# Altium PCB DEP_REVC.PcbDoc
Units mm, origin at the board's own origin, x right, y up, seen from the top; angles counter-clockwise.
Board outline 95.88 x 101.32 mm, 4 copper layers (Top Layer, GND, GND (Plane2), Power), stack 1.586 mm thick; 15 components, 72 nets, 129 pads, 25 vias.
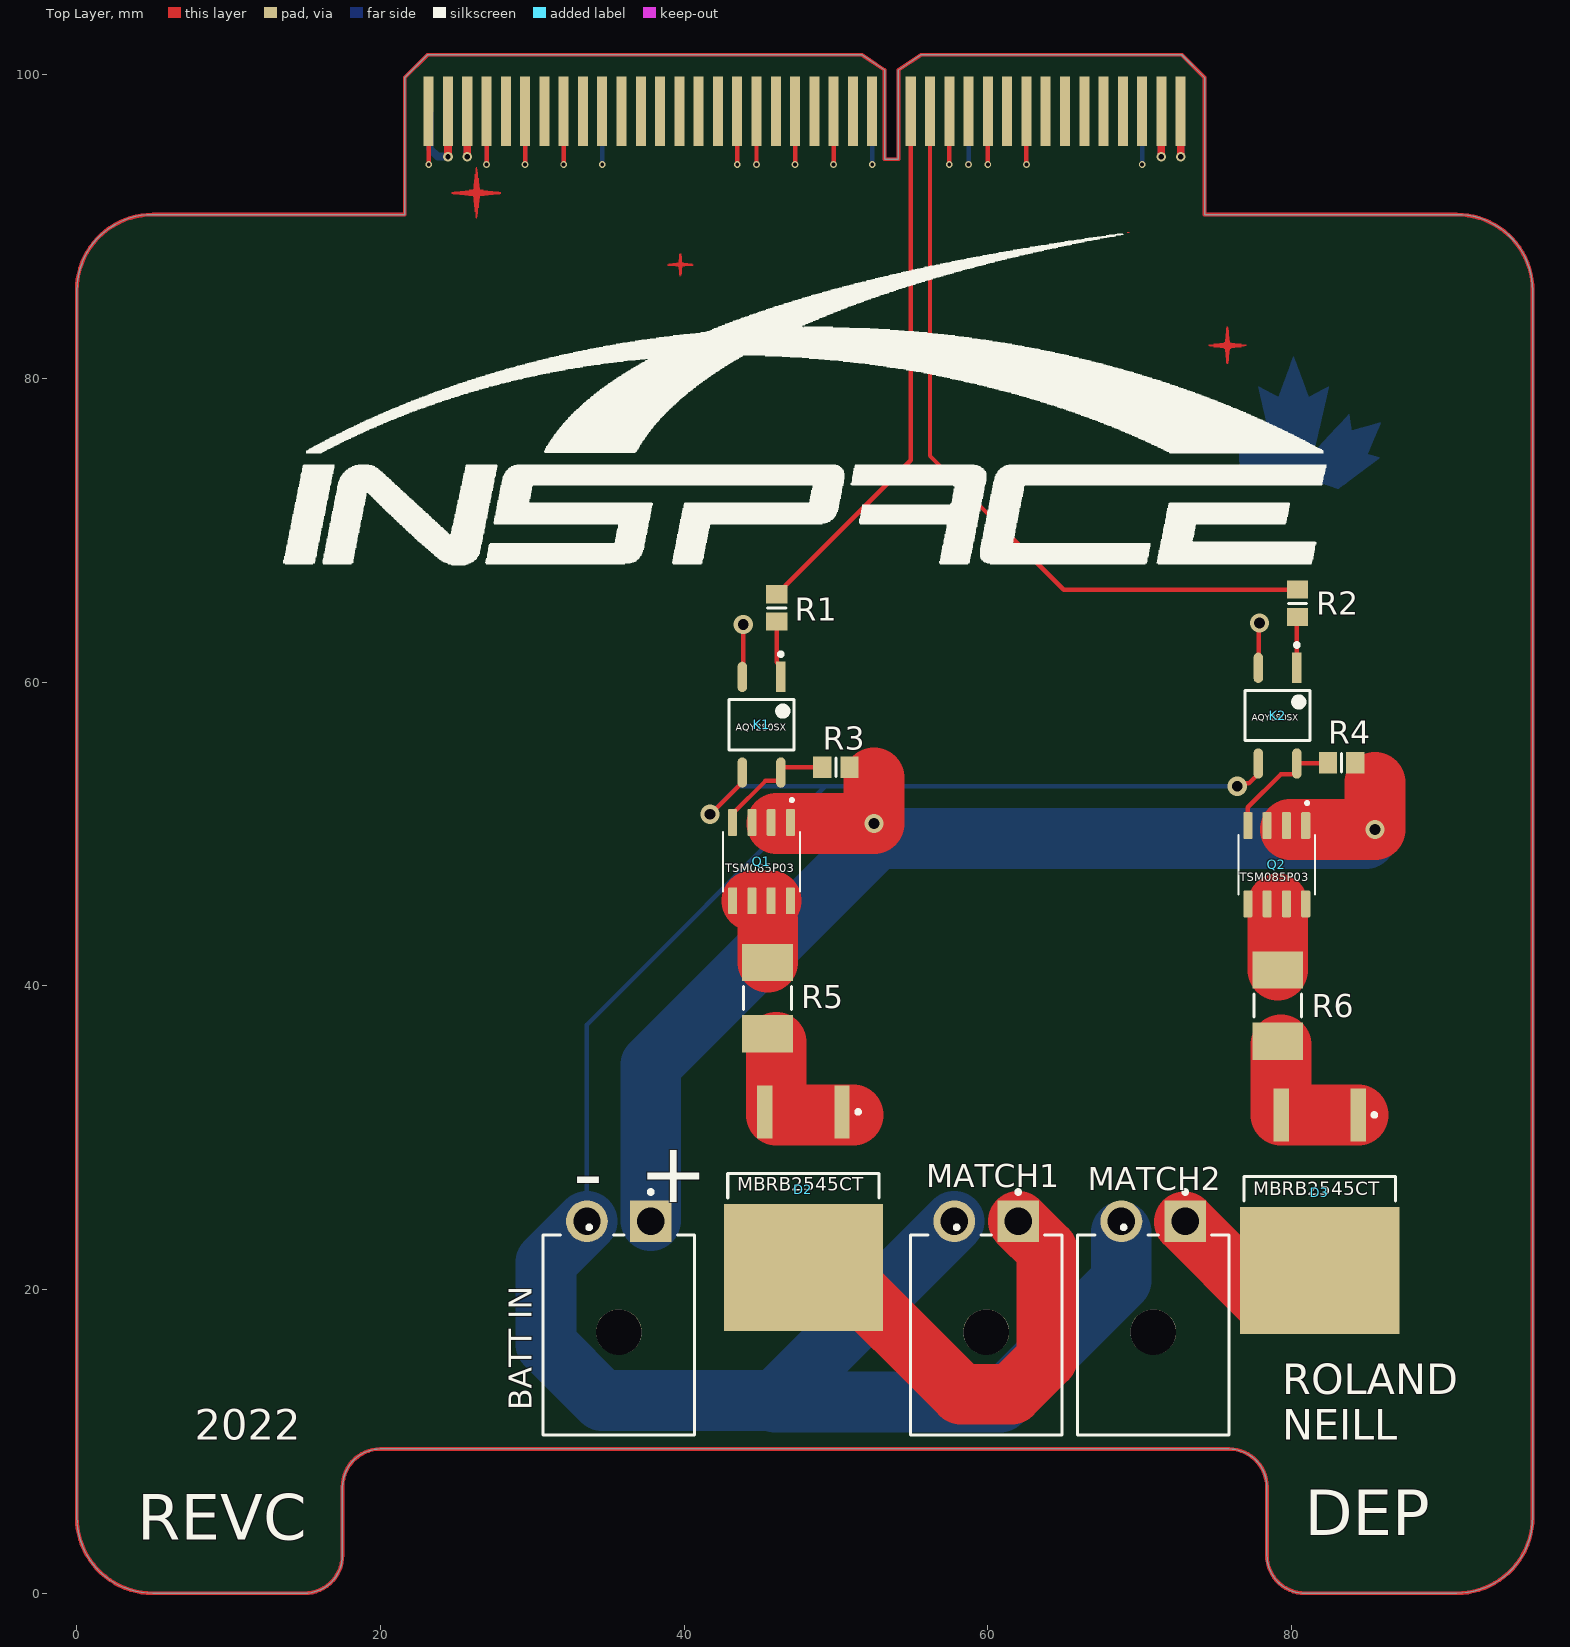
[diagram p0: Top Layer view]
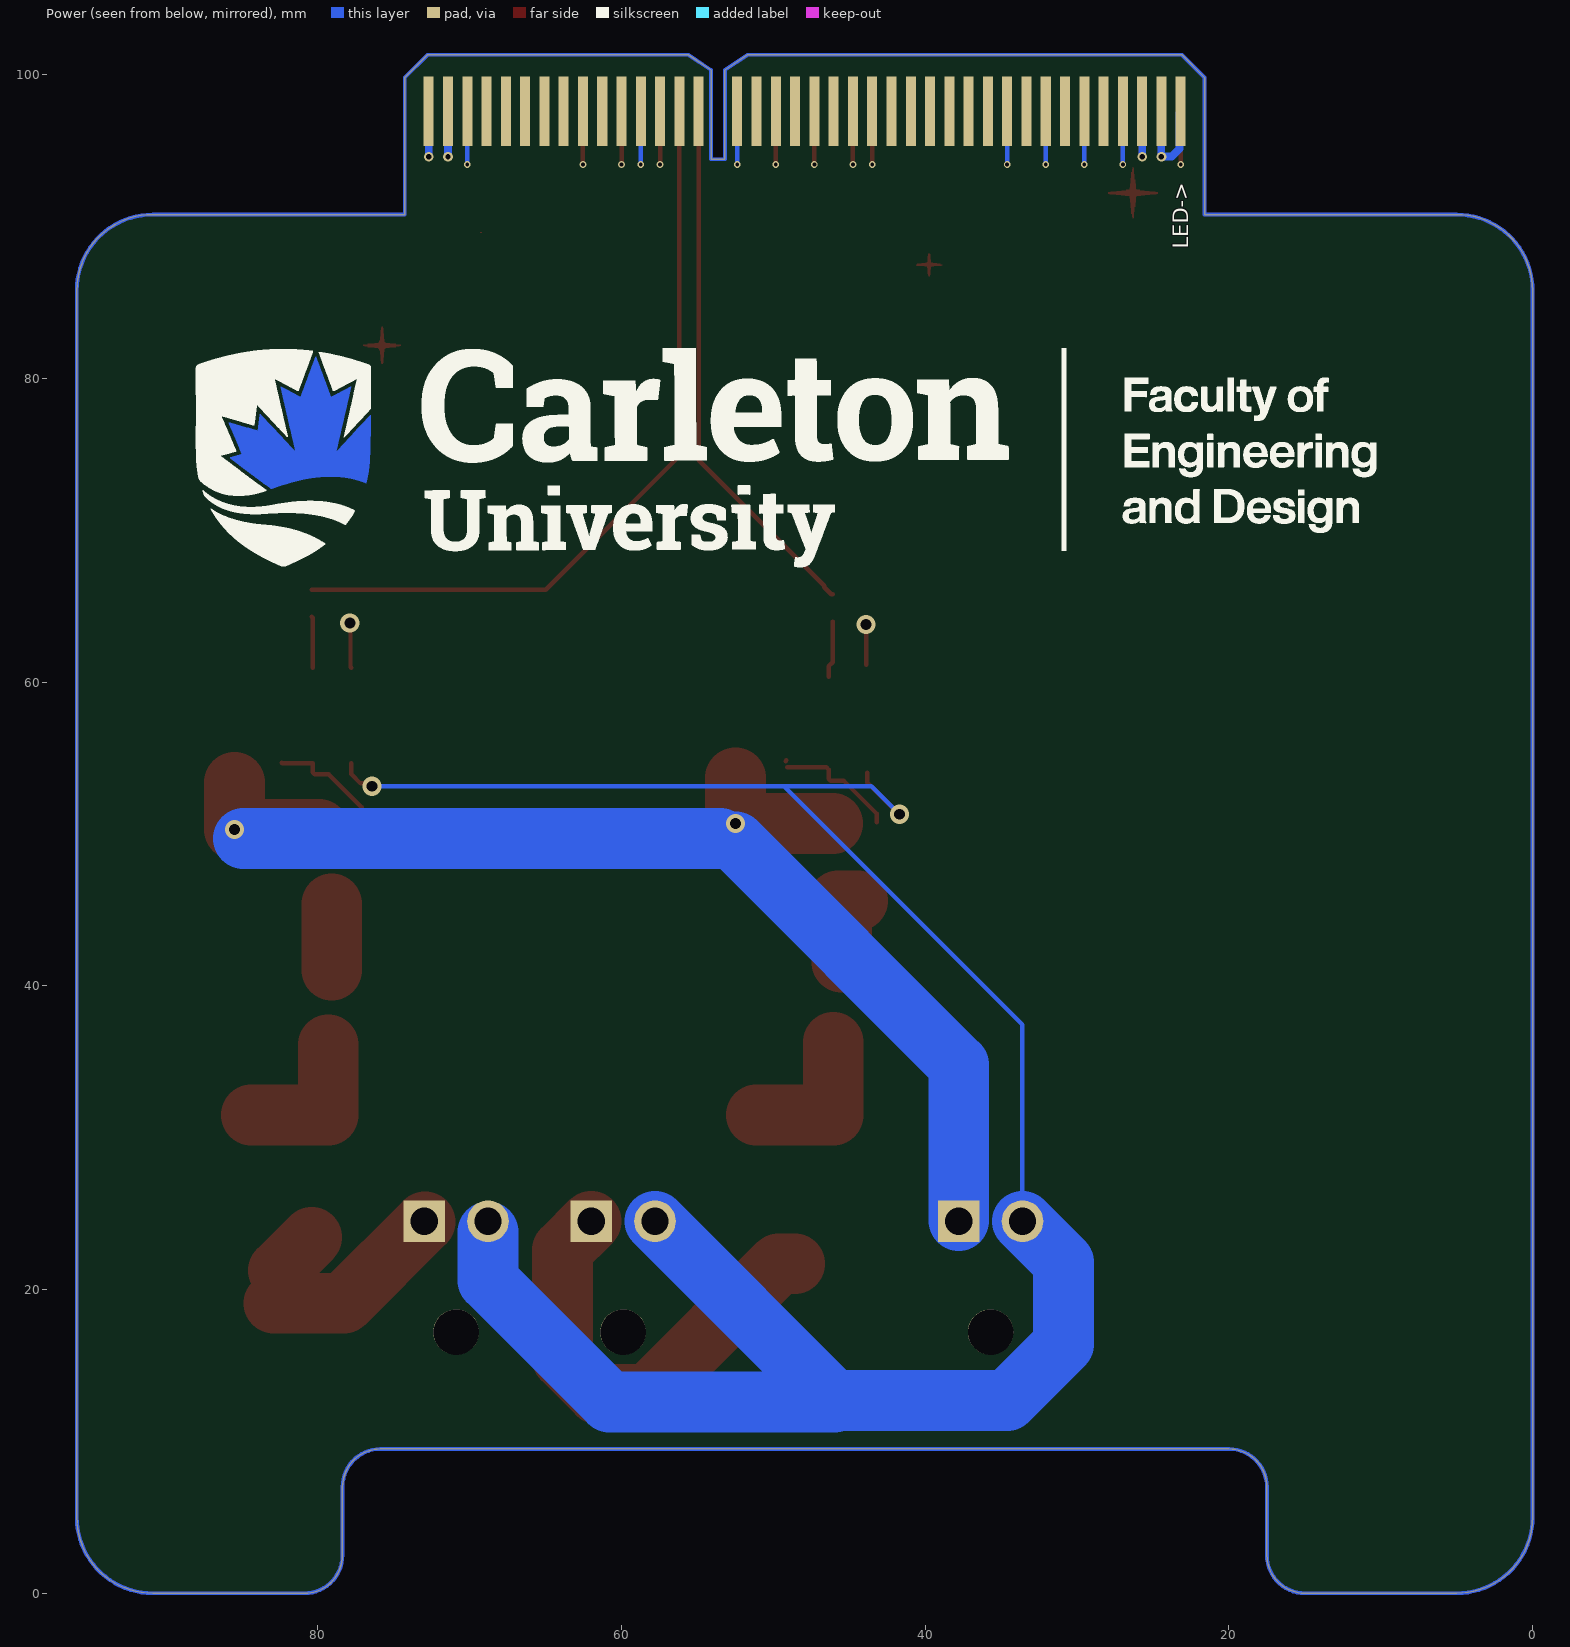
[diagram p1: Power view, seen from below]
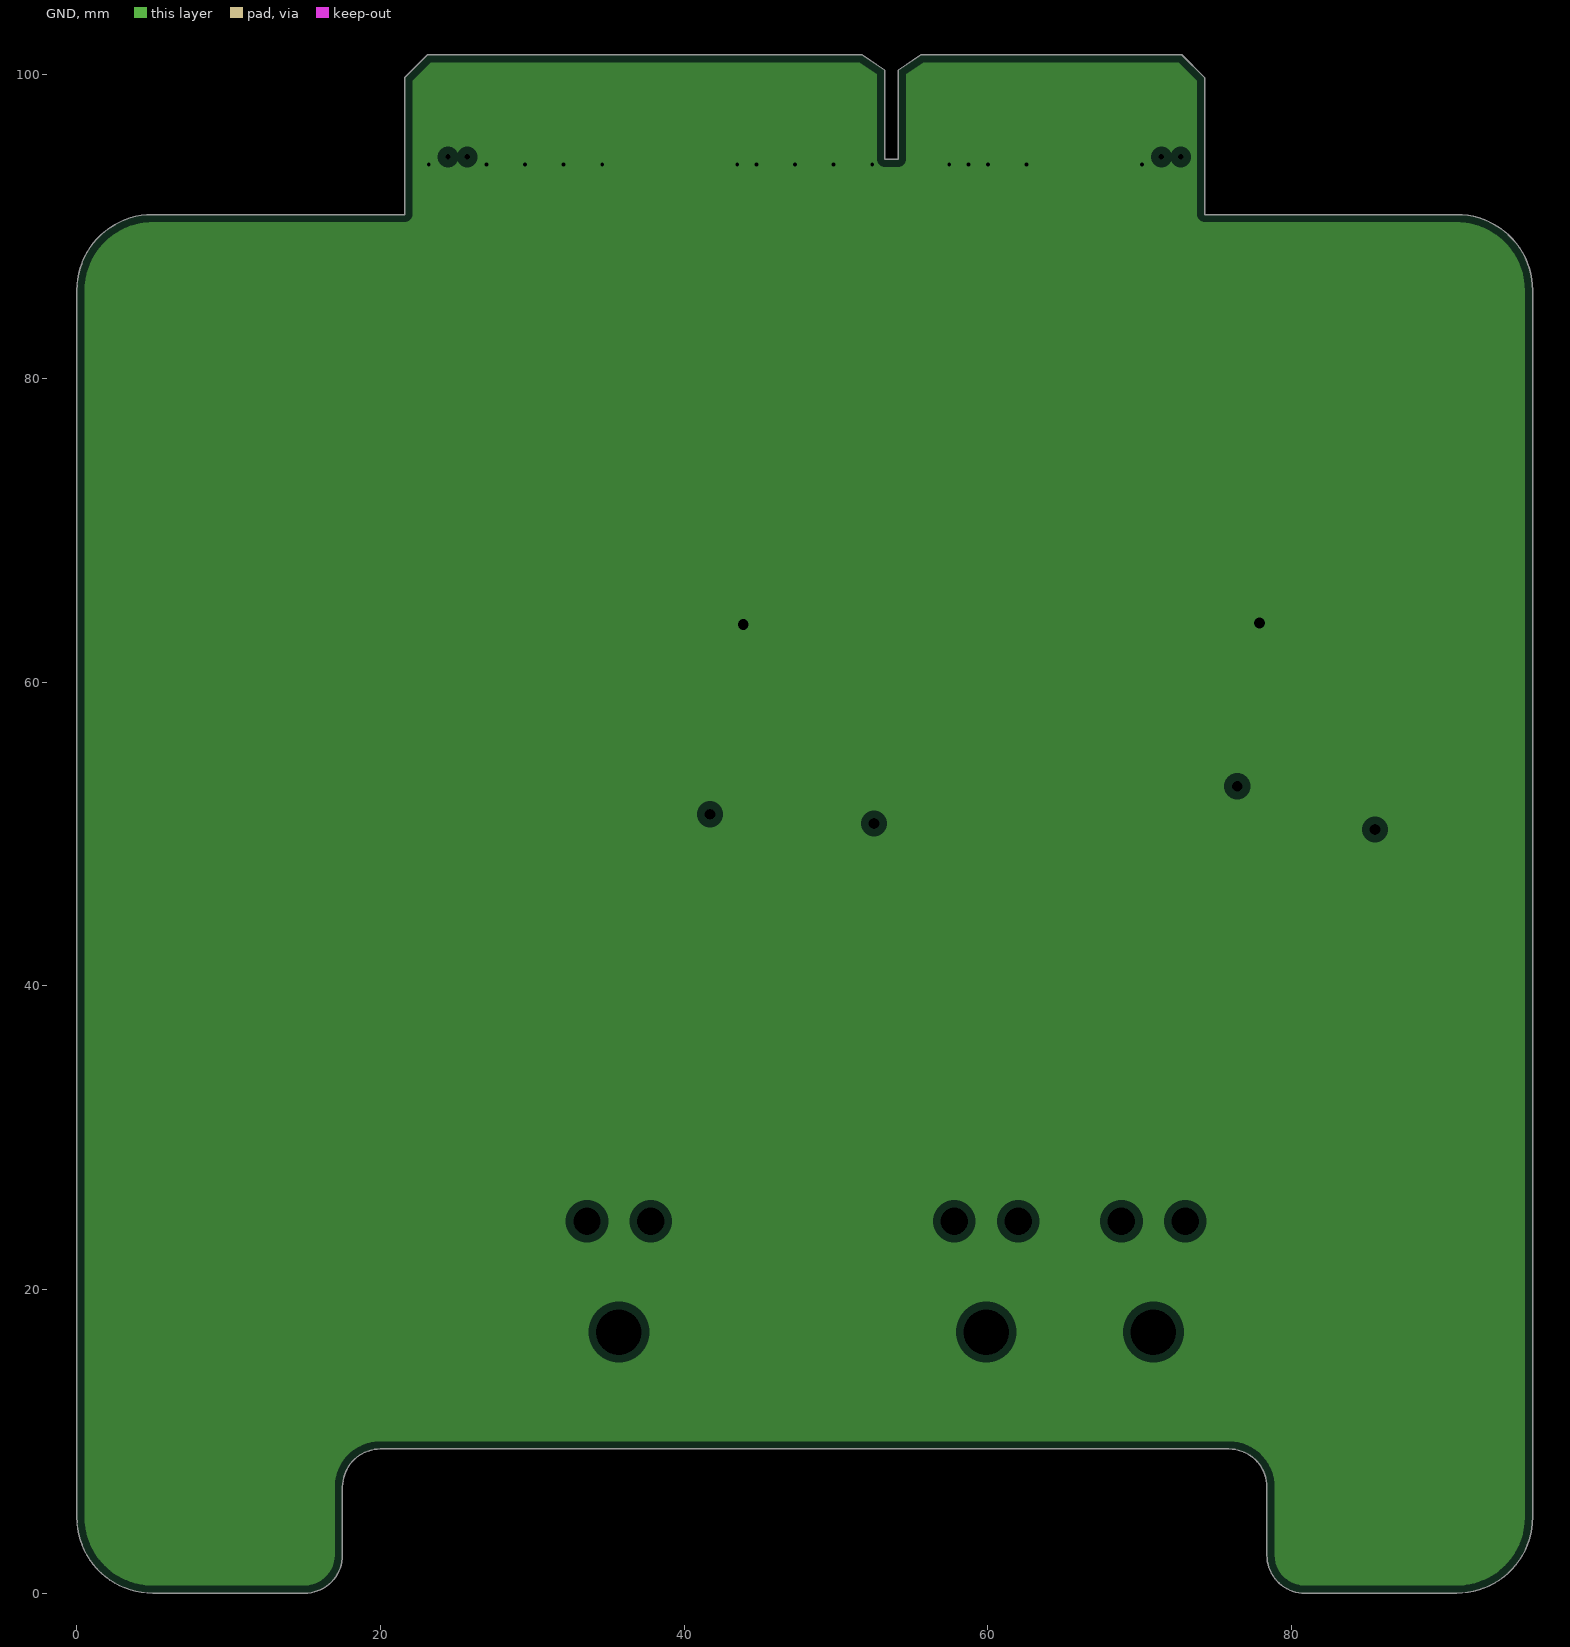
[diagram p2: GND, clearances drawn from the general rule]
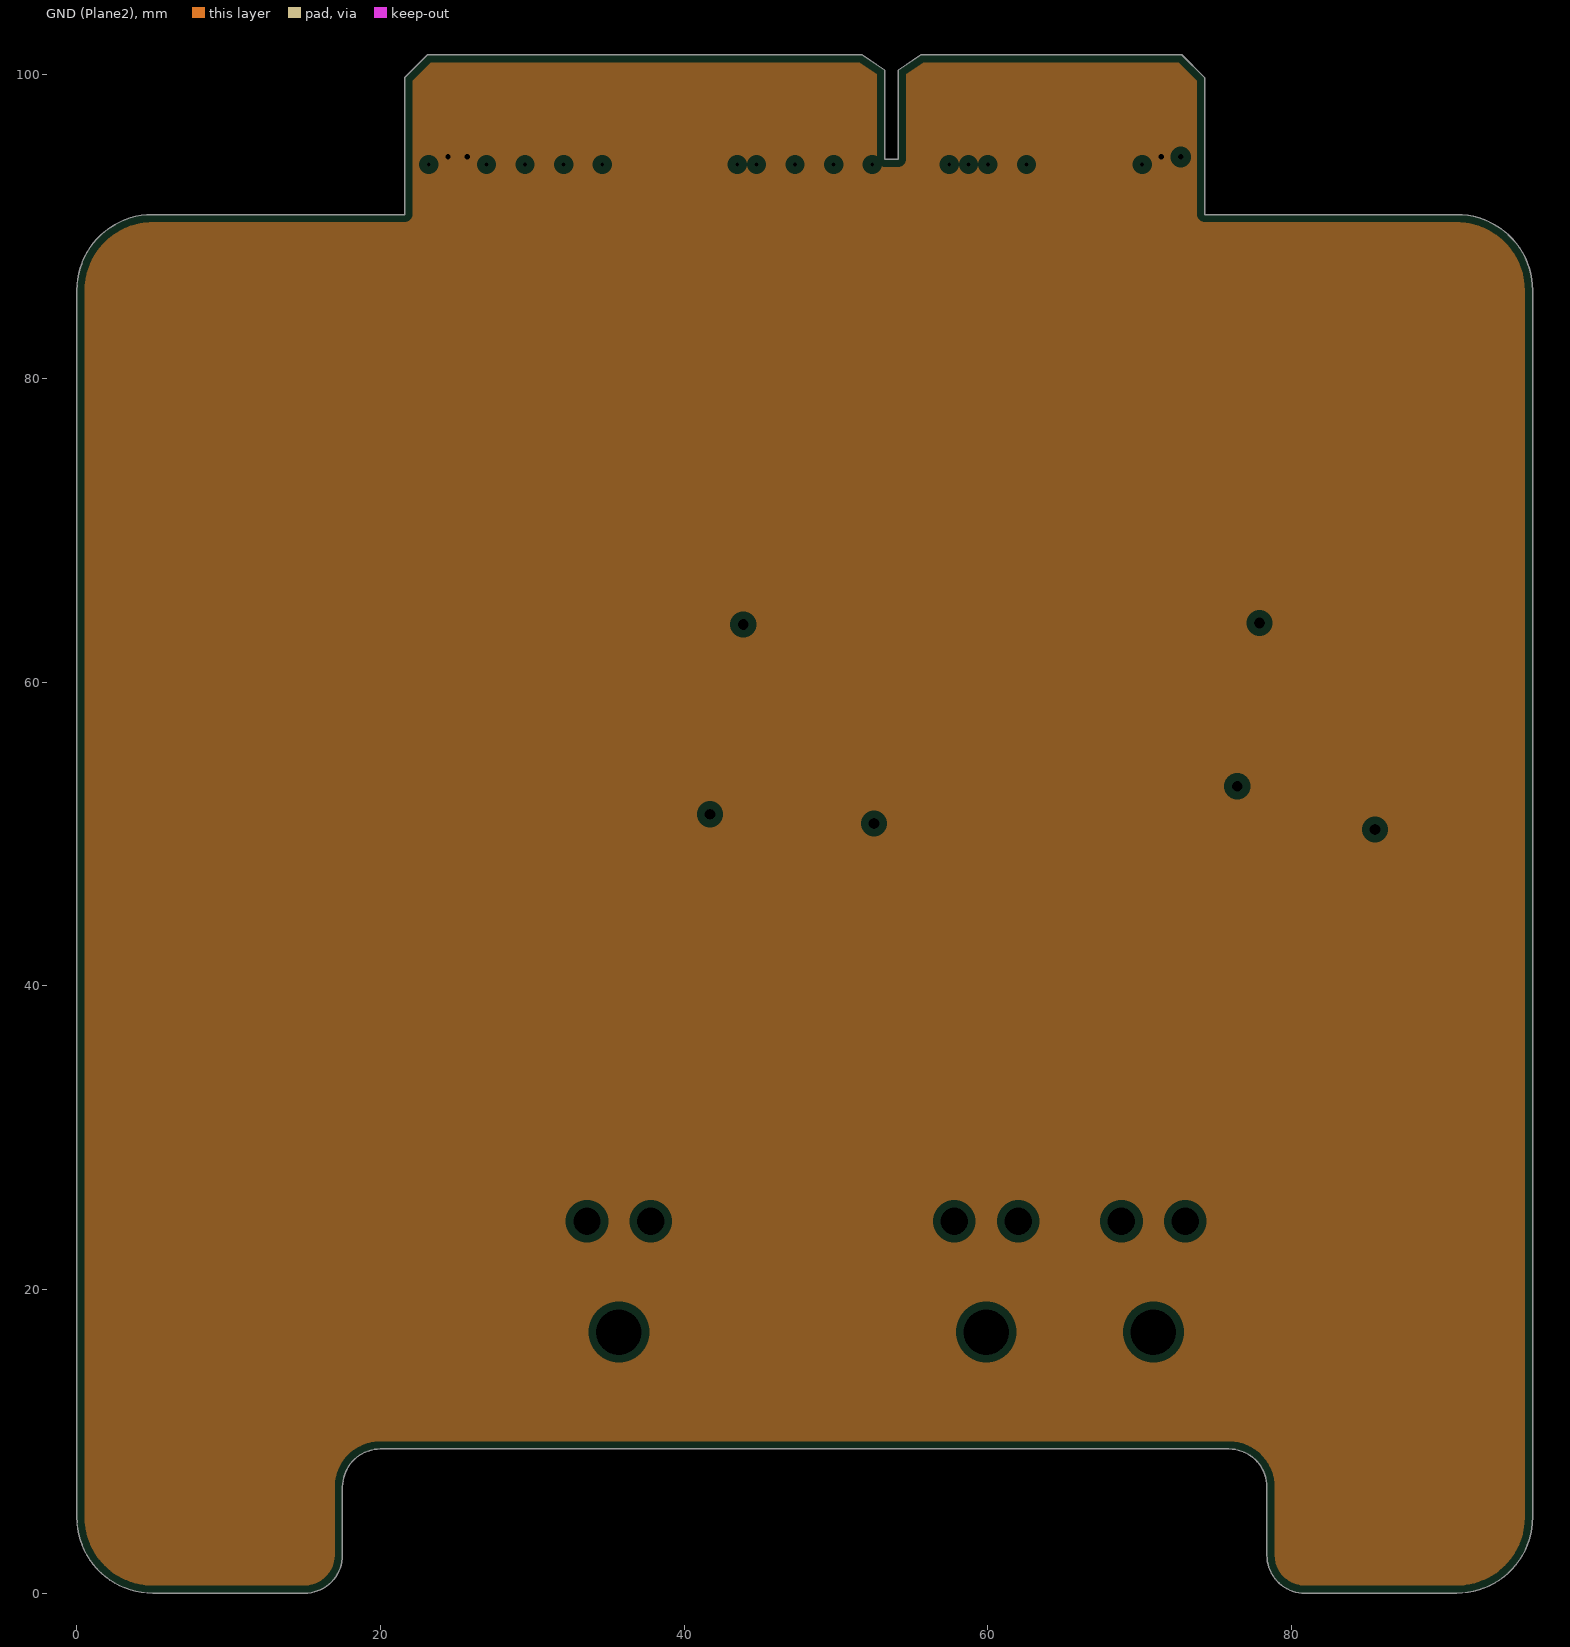
[diagram p3: GND (Plane2), clearances drawn from the general rule]

## Layer stack, top to bottom
Top Solder: solder mask 0.0254, SM-001, Dk 4
Top Layer: signal copper 0.035
Dielectric 2: prepreg 0.2104, PP-006, Dk 4.6
GND: plane copper 0.0152, net GND
Dielectric 1: dielectric 1.065, FR-4, Dk 4.6
GND (Plane2): plane copper 0.0152, net +3.3V
Dielectric 3: prepreg 0.2104, PP-006, Dk 4.6
Power: signal copper 0.035
Bottom Solder: solder mask 0.0254, SM-001, Dk 4

## Board outline
5,0 15,0 ccw(c15,2.5) 17.5,2.5 17.5,7 cw(c20,7) 20,9.5 75.885,9.5 cw(c75.885,7) 78.385,7 78.385,2.5 ccw(c80.885,2.5) 80.885,0 90.885,0 ccw(c90.885,5) 95.885,5 95.885,85.805 ccw(c90.885,85.805) 90.885,90.805 74.282,90.805 74.282,99.825 72.782,101.323 72.782,101.325 55.612,101.325 55.612,101.323 54.112,100.323 54.112,94.445 53.202,94.445 53.202,100.323 51.702,101.323 23.102,101.323 21.602,99.825 21.602,90.805 5,90.805 ccw(c5,85.805) 0,85.805 0,5 ccw(c5,5)

## Design rules (kind name [scope] priority, off if disabled: settings)
Clearance [All] p1: gap=0.254 ignorepadtopadclearanceinfootprint=TRUE except(0: Arc-Hole Track-Hole SMDPad-Hole THPad-Hole Via-Hole Fill-Hole Poly-Hole Region-Hole Text-Hole; 0.127: Arc-Arc Arc-Track Track-Track SMDPad-SMDPad THPad-THPad)
PlaneClearance [All] p1: clearance=0.508
PlaneConnect [All] p1: pad.planeconnectstyle=Relief pad.reliefexpansion=0.508 pad.reliefentries=4 pad.reliefconductorwidth=0.254 pad.reliefairgap=0.254 via.planeconnectstyle=Direct via.reliefexpansion=0.508 via.reliefentries=4 via.reliefconductorwidth=0.254 via.reliefairgap=0.254
PolygonConnect [All] p1: connectstyle=Relief reliefconductorwidth=0.254 reliefentries=4 polygonreliefangle="90 Angle" airgapwidth=0.254
RoutingVias [All] p1: holewidth=0.254 width=0.445 viastyle="Through Hole" minholewidth=0.2 minwidth=0.4 maxholewidth=6.3 maxwidth=6.4
SolderMaskExpansion [All] p1: expansion=0.102 istentingtop=FALSE
Width [All] p1: maxlimit=4 minlimit=0.127 preferedwidth=0.293 minimp=50.000000 maximp=50.000000 favimp=50.000000
28 further rules are at their usual default settings.

## Classes and differential pairs
component class DEP_REVC: "BATT IN" D2 D3 K1 K2 MATCH2 Q1 Q2 R1 R2 R3 R4 R5 R6

## Components (designator, comment, footprint, x,y, rotation, side; value= is the part's Value field where it differs from the comment)
"BATT IN" "1726480102" FP-172648-0102-MFG 35.7,17 r0 top
D2 "MBRB2545CTT4G" ONSC-D2PAK-3-418B-04_V 47.86,25.35 r270 top
D3 "MBRB2545CTT4G" ONSC-D2PAK-3-418B-04_V 81.86,25.15 r270 top
K1 "AQY280SX" FP-AQY282SZ-IPC_A 45.1,57.2 r270 top
K2 "AQY280SX" FP-AQY282SZ-IPC_A 79.085,57.8 r270 top
MATCH1 "1726480102" FP-172648-0102-MFG 59.9,17 r0 top (schematic designator "e-Match 1")
MATCH2 "1726480102" FP-172648-0102-MFG 70.9,17 r0 top (schematic designator "e-Match 2")
Q1 "TSM085P03CS_RLG" SOP127P600X200-8N 45.1,48.18 r270 top
Q2 "TSM085P03CS_RLG" SOP127P600X200-8N 79.035,47.98 r270 top
R1 "Resistor" 6-0805_N 46.1,64.9 r270 top value=1K
R2 "Resistor" 6-0805_N 80.4,65.2 r270 top value=1K
R3 "Resistor" 6-0805_N 50,54.4 r180 top value=1K
R4 "Resistor" 6-0805_N 83.3,54.7 r180 top value=1K
R5 "35221R5JT" RESC6432X12N 45.5,39.2 r270 top
R6 "35221R5JT" RESC6432X12N 79.1,38.7 r270 top

## Footprints (in the part's own frame and the unit in brackets; to place one, negate y for a bottom-side part, rotate by r counter-clockwise, add the part's x,y. Pads: shape width x height; smd on the part's side, far side on the other; paste and mask are expansions set on the pad)
6-0805_N [mm] "Chip Resistor, Body 2.0x1.2mm, IPC Medium Density"
  rect 1.2x1.4 smd: 1(-0.9,0) 2(0.9,0)
  silkscreen extent 0,-0.6 0,0.6, body extent -1.07,-0.7 1.07,0.7, height 0.7
FP-172648-0102-MFG [mm]
  rect 2.75x2.75 hole 1.8 paste-1000 mask+0: 1(2.1,7.5)
  round 2.75 hole 1.8 paste-1000 mask+0: 2(-2.1,7.5)
  round 3 hole 3 unplated paste-1000 mask+0: ""(0,0.2)
  silkscreen extent -4.99,-6.59 4.99,9.55, body extent -5.09,-6.69 5.09,8.98, height 0.25
FP-AQY282SZ-IPC_A [mm]
  rect 2.003x0.612 smd paste+0 mask+0: 1(-3.15,1.27)
  rrect100% 2.003x0.612 smd paste+0 mask+0: 2(-3.15,-1.27) 3(3.15,-1.27) 4(3.15,1.27)
  silkscreen extent -4.78,-2.15 1.65,2.15, body extent -4.65,-2.65 4.65,2.65, height 0.25
ONSC-D2PAK-3-418B-04_V [mm] "DPAK, 3-Leads, Body 9.97x9.145mm, Pitch 2.54mm"
  rect 3.504x1.016 smd: 1(-6.35,2.54) 3(-6.35,-2.54)
  rect 8.38x10.49 smd: 4(3.9,0)
  silkscreen extent -6.47,-4.98 -0.69,4.98, body extent -2.3,-4.98 6.85,4.98, height 4.83
RESC6432X12N [mm] "Chip Resistor, 2-Leads, Body 6.35x3.20mm, IPC Medium Density"
  rect 2.45x3.35 smd: 1(-2.35,0) 2(2.35,0)
  silkscreen extent -0.75,-1.58 0.75,1.58, body extent -3.22,-1.68 3.22,1.68, height 1.2
SOP127P600X200-8N [mm]
  rrect25% 1.76x0.6 smd: 1(-2.58,1.905) 2(-2.58,0.635) 3(-2.58,-0.635) 4(-2.58,-1.905) 5(2.58,-1.905) 6(2.58,-0.635) 7(2.58,0.635) 8(2.58,1.905)
  silkscreen extent -4.16,-2.52 1.95,2.52, body extent -3,-2.42 3,2.42, height 2.1

## Part data
"BATT IN" MATCH1 MATCH2: "No Description Available", Mfr_Name="Molex Connector Corporation", Copyright="Copyright (C) 2022 Ultra Librarian. All rights reserved.", Manufacturer_Part_Number=1726480102, RefDes=RefDes, Type=DEV
D2 D3: library part CMP-004-00032-1, "Rectifier Diode Schottky 45V 30A 3-Pin(2+Tab) D2PAK T/R", Case/Package=D2PAK
K1 K2: library part CMP-00000-1, "Relay Ssr 50MA 1.5V Dc-in 0.5A 60V Ac/dc-out 4-PIN Sop T/r", Case/Package=SOP, Forward Current=1.8mA, Input Current=50mA, Isolation Voltage=1.5kV, Load Current=500mA, Max Input Voltage=1.5V, Max Operating Temperature=85°C, Max Output Voltage=60V, Min Operating Temperature=-40°C, On-State Resistance=2.5R, Package Quantity=1000, Height=2.7mm, Input Type=DC, Isolation Voltage-Max=1.5kV, Lead Free="Lead Free", Length=6.4mm, Max Input Current=50mA, Max Output Current=500mA, Mount="Surface Mount", Number of Pins=4, On-state Resistance-Max=2.5R, Output Current=500mA, Output Voltage=60V, Packaging="Tape and Reel", Radiation Hardening=No, REACH SVHC="No SVHC", Relay Type=Relay, RoHS Compliant=Yes, Series="PhotoMOS™ AQY", Termination="Gull Wing", Throw Configuration=SPST, Width=4.78mm
Q1 Q2: Package=None, Availability=Unavailable, MF="{'manufacturer': u'Taiwan Semiconductor'}", MP=TSM085P03CS_RLG, Price=None
R5 R6: library part CMP-009-00177-2, "Res Thick Film 2512 1.5 Ohm 5% 3W ±200ppm/°C Molded SMD T/R", Case Code (Metric)=6432, Max Power Dissipation=3W, Resistance=1.5, Resistance Tolerance=5%, Voltage Rating=250V, Mount="Surface Mount", Power Rating=3W, Voltage Rating (DC)=250V
R1 R2 R3 R4: SimulationGenericComponent=True, TC1=0, TC2=0

## Free pads (board coordinates)
  rect 0.66x4.572 smd: 1(72.707,97.6) 3(71.437,97.6) 5(70.167,97.6) 7(68.897,97.6) 9(67.627,97.6) 11(66.357,97.6) 13(65.087,97.6) 15(63.817,97.6) 17(62.547,97.6) 19(61.277,97.6) 21(60.007,97.6) 23(58.737,97.6) 25(57.467,97.6) 27(56.197,97.6) 29(54.927,97.6) 31(52.387,97.6) 33(51.117,97.6) 35(49.847,97.6) 37(48.577,97.6) 39(47.307,97.6) 41(46.037,97.6) 43(44.767,97.6) 45(43.497,97.6) 47(42.227,97.6) 49(40.957,97.6) 51(39.687,97.6) 53(38.417,97.6) 55(37.147,97.6) 57(35.877,97.6) 59(34.607,97.6) 61(33.337,97.6) 63(32.067,97.6) 65(30.797,97.6) 67(29.527,97.6) 69(28.257,97.6) 71(26.987,97.6) 73(25.717,97.6) 75(24.447,97.6) 77(23.177,97.6)
  rect 0.66x4.572 smd far side: 2(72.707,97.6) 4(71.437,97.6) 6(70.167,97.6) 8(68.897,97.6) 10(67.627,97.6) 12(66.357,97.6) 14(65.087,97.6) 16(63.817,97.6) 18(62.547,97.6) 20(61.277,97.6) 22(60.007,97.6) 24(58.737,97.6) 26(57.467,97.6) 28(56.197,97.6) 30(54.927,97.6) 32(52.387,97.6) 34(51.117,97.6) 36(49.847,97.6) 38(48.577,97.6) 40(47.307,97.6) 42(46.037,97.6) 44(44.767,97.6) 46(43.497,97.6) 48(42.227,97.6) 50(40.957,97.6) 52(39.687,97.6) 54(38.417,97.6) 56(37.147,97.6) 58(35.877,97.6) 60(34.607,97.6) 62(33.337,97.6) 64(32.067,97.6) 66(30.797,97.6) 68(29.527,97.6) 70(28.257,97.6) 72(26.987,97.6) 74(25.717,97.6) 76(24.447,97.6) 78(23.177,97.6)

## Via types
v1: diameter 0.444, hole 0.254, Top Layer to Power, 15 vias
v2: diameter 1.27, hole 0.711, Top Layer to Power, 6 vias
v3: diameter 0.635, hole 0.356, Top Layer to Power, 4 vias

## Nets (pads, with @x,y where several pads share a name; then routed paths per layer and width w, separated by ;. In a path a pad name is that pad's centre, name@x,y a point inside that pad or via, vN(x,y) a via of type N, cw(c..) or ccw(c..) an arc to the next point about the centre after c; other vN are vias at no path point)
+3.3V: pad.3 pad.4 pad.73 pad.74 pad.75 pad.76 pad.78 | length 21.9
  Top Layer w0.5: v3(24.447,94.6) pad.75 ; v3(25.717,94.6) pad.73 ; v3(71.437,94.6) pad.3
  Power w0.5: pad.78 23.257,97.52 23.257,95.143 23.774,94.626 24.421,94.626 v3(24.447,94.6) pad.76 ; v3(25.717,94.6) pad.74 ; v3(71.437,94.6) pad.4
+5V: pad.1 pad.2 | length 6
  Top Layer w0.5: v3(72.707,94.6) pad.1
  Power w0.5: v3(72.707,94.6) pad.2
A0: pad.22
A1: pad.20
A2: pad.18
A3: pad.16
A4: pad.14
A5: pad.12
A6: pad.10
A7: pad.8
A12: pad.31
A13: pad.33
BAT+: "BATT IN.1" Q1.1 Q1.2 Q1.3 Q2.1 Q2.2 Q2.3 R3.1 R4.1 | length 81.4
  Top Layer w0.293: Q2.1 81.86,50.56
  Top Layer w4: 46.1,50.7 v2(52.5,50.7) 52.5,53.7 ; Q2.2@79.93,50.3 v2(85.5,50.3) 85.5,53.4
  Power w4: 37.8,24.554 37.8,34.8 52.5,49.5 ; 53.5,49.7 84.9,49.7
BAT-: "BATT IN.2" K1.3 K2.3 MATCH1.2 MATCH2.2 | length 149.3
  Top Layer w0.293: v2(41.7,51.3) 41.738,51.3 43.83,53.392 K1.3 ; v2(76.435,53.148) 76.622,53.335 77.196,53.335 77.815,53.955 K2.3
  Power w0.293: 33.6,24.5 33.6,37.448 49.3,53.148 ; v2(41.7,51.3) 43.548,53.148 49.3,53.148 ; v2(76.435,53.148) 49.3,53.148
  Power w2: MATCH2.2@68.8,23.792 MATCH2.2
  Power w4: 33.6,24.5 30.9,21.8 30.9,16.4 34.6,12.7 46,12.7 MATCH1.2 ; 46,12.6 60.8,12.6 68.8,20.6 MATCH2.2@68.8,23.792
DAC0: pad.41
DAC1: pad.37
GND: K1.2 K2.2 pad.6 pad.17 pad.21 pad.24 pad.25 pad.32 pad.35 pad.39 pad.43 pad.45 pad.60 pad.63 pad.64 pad.67 pad.68 pad.71 pad.72 pad.77 | length 68.6
  Top Layer w0.293: v1(23.177,94.1) pad.77 ; v1(26.987,94.1) pad.71 ; v1(29.527,94.1) pad.67 ; v1(32.067,94.1) pad.63 ; v1(43.497,94.1) pad.45 ; K1.2@43.88,61.15 43.89,61.16 43.89,63.79 v2(43.9,63.8) ; v1(44.767,94.1) pad.43 ; v1(47.307,94.1) pad.39 ; v1(49.847,94.1) pad.35 ; v1(57.467,94.1) pad.25 ; v1(60.007,94.1) pad.21 ; v1(62.547,94.1) pad.17 ; K2.2 77.857,60.993 77.857,63.857 v2(77.9,63.9)
  Power w0.293: v1(26.987,94.1) pad.72 ; v1(29.527,94.1) pad.68 ; v1(32.067,94.1) pad.64 ; v1(34.607,94.1) pad.60 ; v1(52.387,94.1) pad.32 ; v1(58.737,94.1) pad.24 ; v1(70.167,94.1) pad.6
GPIO0: pad.58
GPIO1: pad.56
GPIO2: pad.54
GPIO3: pad.52
GPIO4: pad.50
GPIO5: pad.48
GPIO6: pad.46
GPIO7: pad.44
GPIO8: pad.42
GPIO9: pad.40
GPIO10: pad.38
GPIO11: pad.36
GPIO12: pad.34
GPIO13: pad.30
GPIO14: pad.28
GPIO15: pad.26
GPIO22: pad.27 R2.1 | length 50.5
  Top Layer w0.293: pad.27 56.197,74.904 65,66.1 R2.1
GPIO23: pad.29 R1.1 | length 35.5
  Top Layer w0.293: R1.1 46.2,65.8 46.654,66.253 46.654,66.353 54.927,74.626 pad.29
I2C0_SCL: pad.69
I2C0_SDA: pad.65
I2C1_SCL: pad.23
I2C1_SDA: pad.19
Net2_1: K2.1 R2.2 | length 3.4
  Top Layer w0.293: K2.1 80.355,64.255 R2.2
Net2_4: K2.4 Q2.4 R4.2 | length 8
  Top Layer w0.293: Q2.4 77.13,51.767 79.289,53.926 80.208,53.926 80.355,54.073 K2.4 82.35,54.65 R4.2
"NetBATT IN_1": 
NetD1_2: 
NetD2_1: D2.1 D2.3 R5.2 | length 9.4
  Top Layer w4: 46.06,31.5 51.14,31.5 ; 46.06,31.95 R5.2@46.06,36.29
NetD2_4: D2.4 MATCH1.1 | length 29.7
  Top Layer w4: D2.4@48.6,21.7 49.655,21.7 58.243,13.112 61.557,13.112 63.9,15.455 63.9,22.6 MATCH1.1
NetD3_1: D3.1 D3.3 R6.2 | length 9.7
  Top Layer w4: R6.2@79.32,36.13 D3.3 D3.1
NetD3_4: D3.4 MATCH2.1 | length 15.3
  Top Layer w4: MATCH2.1@72.95,24.45 78.3,19.1 D3.4@82.9,19.1 ; D3.4@80.41,23.44 D3.4@82.6,21.25
NetJ1_1: 
NetJ3_1: 
NetK1_1: K1.1 R1.2 | length 3.8
  Top Layer w0.293: R1.2 46.1,61.315 46.37,61.045 K1.1
NetK1_4: K1.4 Q1.4 R3.2 | length 8.2
  Top Layer w0.293: Q1.4@43.208,50.773 43.208,51.353 45.356,53.501 46.223,53.501 46.37,53.648 K1.4 46.37,54.253 46.517,54.4 R3.2 ; R3.2@49.15,54.85 R3.2@49.2,54.8
NetQ1_5: Q1.5 Q1.6 Q1.7 Q1.8 R5.1 | length 4
  Top Layer w4: Q1.6 Q1.7 ; R5.1 45.5,44.3
NetQ2_5: Q2.5 Q2.6 Q2.7 Q2.8 R6.1 | length 4.4
  Top Layer w4: R6.1 79.1,45.4
NetR5_1: 
NetR6_1: 
PORT0: pad.15
PORT1: pad.13
PORT2: pad.11
PORT3: pad.9
PORT4: pad.7
PORT5: pad.5
SPI_MISO: pad.62
SPI_MOSI: pad.66
SPI_SCK: pad.70
UART0_RX: pad.61
UART0_TX: pad.59
UART1_RX: pad.57
UART1_TX: pad.55
UART2_RX: pad.53
UART2_TX: pad.51
UART3_RX: pad.49
UART3_TX: pad.47
pads on no net: "BATT IN." MATCH1. MATCH2.

## Polygon pours and split planes (outlines as drawn)
GND on GND (split plane): 298 vertices, not listed, extent 0.509,0.509 95.376,100.815
+3.3V on GND (Plane2) (split plane): 298 vertices, not listed, extent 0.509,0.509 95.376,100.815

## Other copper
Top Layer:
  region: 75.51,82.319 75.55,82.319 75.55,82.359 75.59,82.359 75.59,82.399 75.63,82.399 75.63,82.598 75.67,82.598 75.67,82.958 75.71,82.958 75.71,83.317 75.75,83.317 75.75,83.397 75.789,83.397 75.789,83.357 75.829,83.357 75.829,83.197 75.869,83.197 75.869,82.758 75.909,82.758 75.909,82.478 75.949,82.478 75.949,82.359 76.029,82.359 76.029,82.319 76.269,82.319 76.269,82.279 76.708,82.279 76.708,82.239 77.028,82.239 77.028,82.159 76.908,82.159 76.908,82.119 76.708,82.119 76.708,82.079 76.269,82.079 76.269,82.039 76.029,82.039 76.029,81.999 75.989,81.999 75.989,81.959 75.949,81.959 75.949,81.879 75.909,81.879 75.909,81.6 75.869,81.6 75.869,81.16 75.829,81.16 75.829,81.001 75.789,81.001 75.789,80.961 75.75,80.961 75.75,81.041 75.71,81.041 75.71,81.4 75.67,81.4 75.67,81.76 75.63,81.76 75.63,81.959 75.59,81.959 75.59,81.999 75.55,81.999 75.55,82.039 75.31,82.039 75.31,82.079 74.871,82.079 74.871,82.119 74.631,82.119 74.631,82.159 74.551,82.159 74.551,82.239 74.871,82.239 74.871,82.279 75.27,82.279 75.27,82.319 75.47,82.319
  region: 69.279,89.588 69.199,89.588 69.199,89.628 69.319,89.628 69.319,89.588
  region: 39.682,87.152 39.682,87.192 39.642,87.192 39.642,87.351 39.602,87.351 39.602,87.391 39.442,87.391 39.442,87.431 38.963,87.431 38.963,87.471 38.883,87.471 38.883,87.511 39.003,87.511 39.003,87.551 39.243,87.551 39.243,87.591 39.522,87.591 39.522,87.631 39.642,87.631 39.642,87.831 39.682,87.831 39.682,88.19 39.722,88.19 39.722,88.23 39.802,88.23 39.802,88.07 39.842,88.07 39.842,87.671 39.882,87.671 39.882,87.631 39.962,87.631 39.962,87.591 40.241,87.591 40.241,87.551 40.521,87.551 40.521,87.511 40.601,87.511 40.601,87.471 40.561,87.471 40.561,87.431 40.042,87.431 40.042,87.391 39.882,87.391 39.882,87.311 39.842,87.311 39.842,86.912 39.802,86.912 39.802,86.792 39.762,86.792 39.762,86.752 39.722,86.752 39.722,86.832 39.682,86.832 39.682,87.112
  region: 25.223,92.304 25.263,92.304 25.263,92.344 25.583,92.344 25.583,92.384 25.862,92.384 25.862,92.424 26.102,92.424 26.102,92.464 26.142,92.464 26.142,92.823 26.182,92.823 26.182,93.103 26.222,93.103 26.222,93.463 26.262,93.463 26.262,93.862 26.302,93.862 26.302,93.902 26.341,93.902 26.341,93.782 26.381,93.782 26.381,93.582 26.421,93.582 26.421,93.183 26.461,93.183 26.461,92.823 26.501,92.823 26.501,92.584 26.541,92.584 26.541,92.424 26.781,92.424 26.781,92.384 27.06,92.384 27.06,92.344 27.38,92.344 27.38,92.304 27.779,92.304 27.779,92.264 27.939,92.264 27.939,92.184 27.859,92.184 27.859,92.144 27.42,92.144 27.42,92.104 27.1,92.104 27.1,92.065 26.821,92.065 26.821,92.025 26.541,92.025 26.541,91.865 26.501,91.865 26.501,91.625 26.461,91.625 26.461,91.266 26.421,91.266 26.421,90.866 26.381,90.866 26.381,90.667 26.341,90.667 26.341,90.547 26.302,90.547 26.302,90.587 26.262,90.587 26.262,90.986 26.222,90.986 26.222,91.306 26.182,91.306 26.182,91.625 26.142,91.625 26.142,91.985 26.102,91.985 26.102,92.025 25.822,92.025 25.822,92.065 25.543,92.065 25.543,92.104 25.223,92.104 25.223,92.144 24.784,92.144 24.784,92.184 24.704,92.184 24.704,92.264 24.864,92.264 24.864,92.304 25.183,92.304
Power:
  region: 1830 vertices and 0 holes, not listed, extent 76.512,72.744 85.873,81.433
Multi-Layer:
  lines w0.254: 21.602,90.805 5,90.805 ccw(c5,85.805) 0,85.805 0,5 ccw(c5,5) 5,0 15,0 ccw(c15,2.5) 17.5,2.5 17.5,7 cw(c20,7) 20,9.5 75.885,9.5 cw(c75.885,7) 78.385,7 78.385,2.5 ccw(c80.885,2.5) 80.885,0 90.885,0 ccw(c90.885,5) 95.885,5 95.885,85.805 ccw(c90.885,85.805) 90.885,90.805 74.282,90.805 74.282,99.825 72.782,101.323 ; 21.602,90.805 21.602,99.825 23.102,101.323 51.702,101.323 53.202,100.323 53.202,94.445 ; 53.202,94.445 54.112,94.445 54.112,100.323 55.612,101.323 ; 55.612,101.325 72.782,101.325

## Silkscreen, mask and mechanical layers (free items; w line width, h text height)
Top Overlay:
  drawing of 7 lines, arcs and shapes, not listed
  text "AQY280SX" at 77.4,57.3 h0.75
  text "AQY280SX" at 43.4,56.8 h0.45
  text "TSM085P03" at 42.7,47.5 h0.55
  text "TSM085P03" at 76.6,46.9 h0.55
  text "MBRB2545CT" at 43.5,26.2 h1.52
  text "MBRB2545CT" at 77.5,25.9 h1.52
  text "+" at 37,25.734 h4
  text "-" at 32.7,25.701 h4
  text "ROLAND" at 79.385,13.1 h2
  text "2022" at 7.769,10.1 h2
  text "NEILL" at 79.385,10.1 h2
  text "DEP" at 80.893,3.808 h3
  text "REVC" at 3.996,3.508 h3
Bottom Overlay:
  drawing of 57 lines, arcs and shapes, not listed
  text "LED->" at 22.677,88.554 h1 r270